# EAGLE board lv1-fc-1 (EAGLE 3.55)
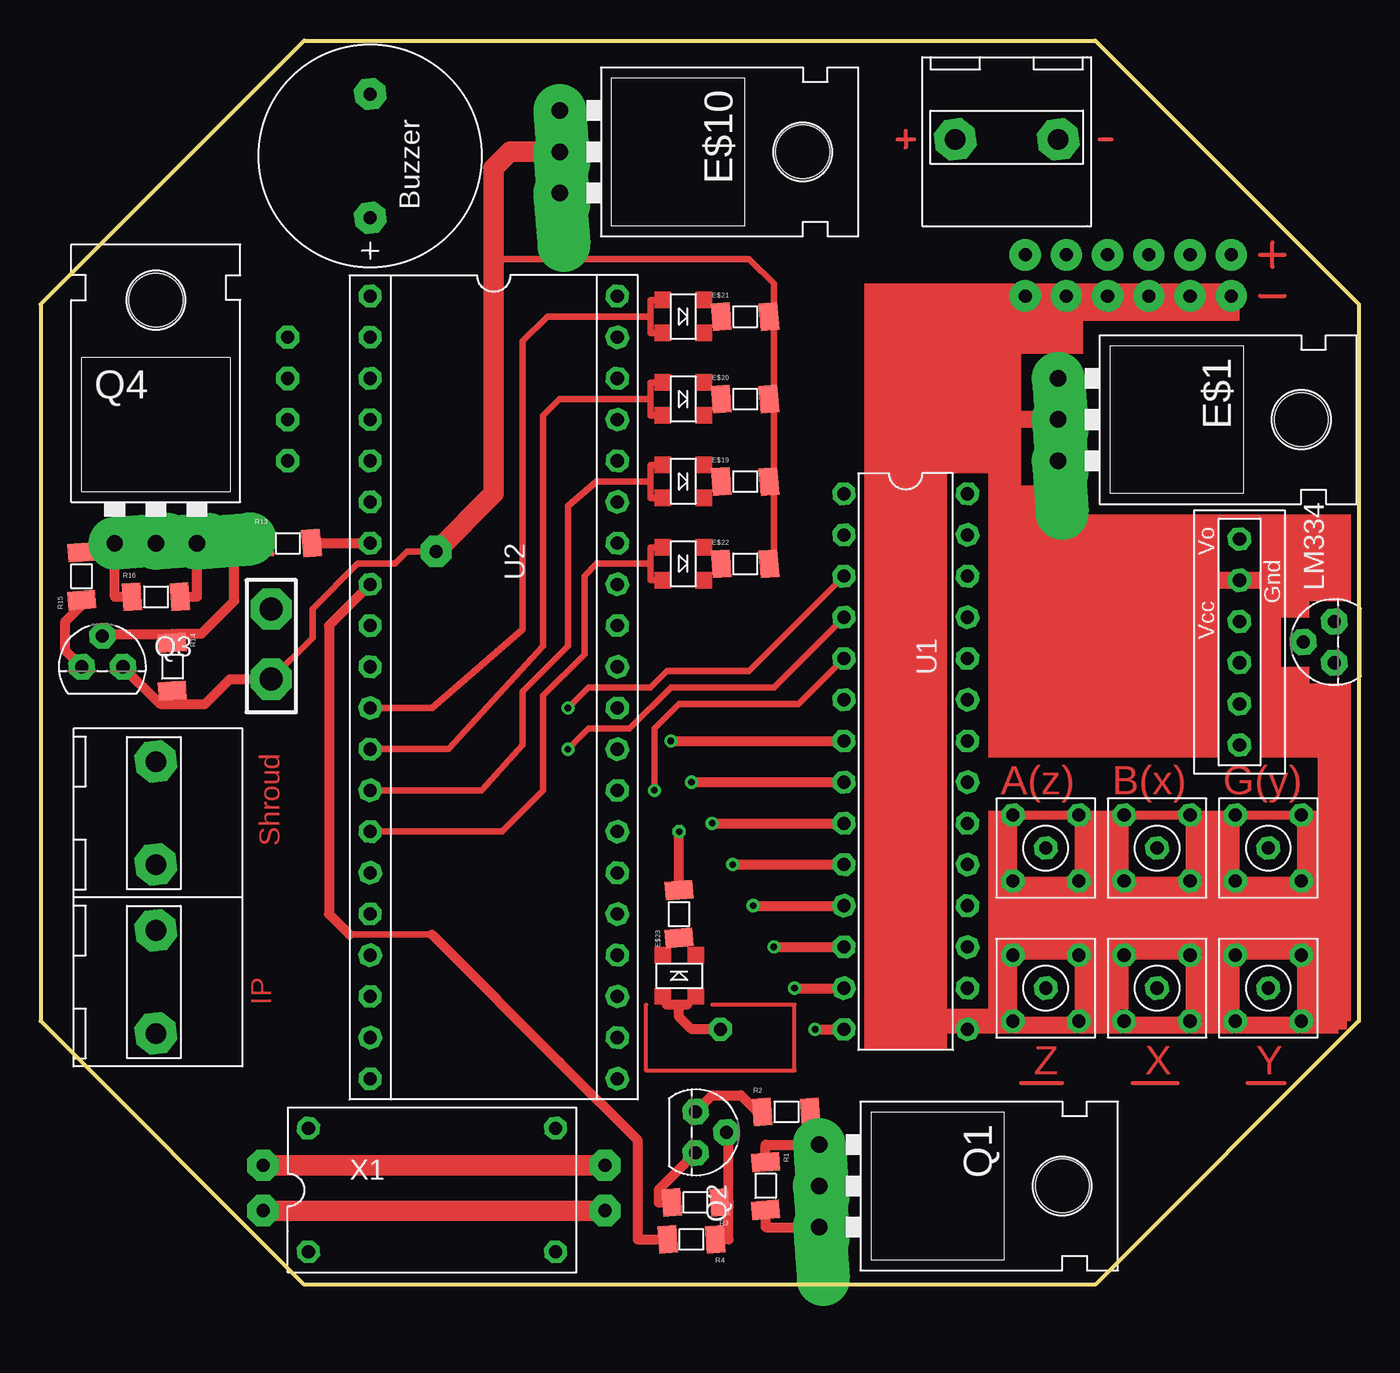
[diagram p0: board, top side]
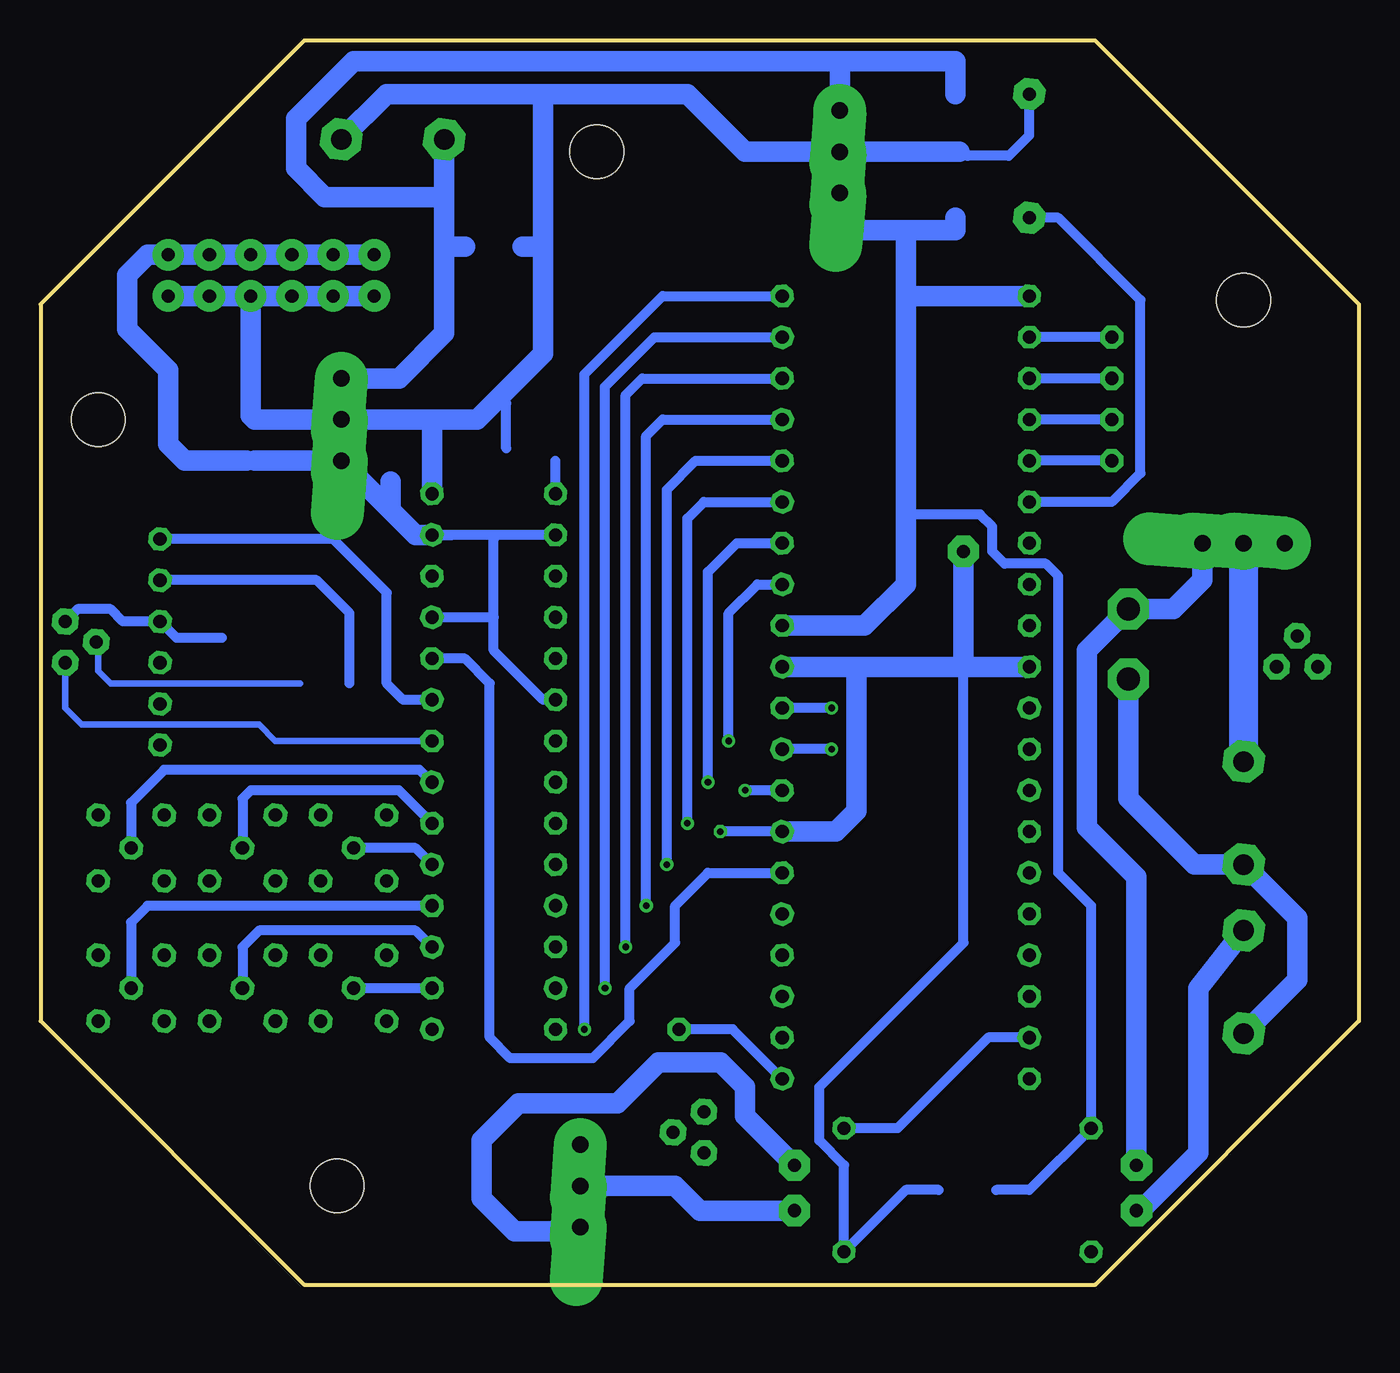
[diagram p1: board, bottom side, seen from below]

Size 81.28 x 76.71 mm. Coordinates in mm from the lower left corner, seen from the top.
Outline: 0,60.45 16.26,76.71 65.02,76.71 81.28,60.45 81.28,16.26 65.02,0 16.26,0 0,16.26 0,60.45
Copper layers used: Top, Bottom

## Footprints (pad centres in the part's own frame; a part is rotated, then mirrored left to right if it is on the bottom)
220L1 = drill 1.016 pad 3.251 offset:  -2.54,-3.81;  0,-3.81;  2.54,-3.81 | hole 3.302: 0,11.176
RO_2 = drill 1.27 pad 2.54 octagon:  0,0;  6.35,0
AX_IN = drill 0.813 pad 1.422 octagon:  0,0;  2.032,2.032;  -2.032,2.032;  -2.032,-2.032;  2.032,-2.032
X5100A = drill 0.813 pad 1.422 octagon:  0,0;  2.54,0;  5.08,0;  7.62,0;  10.16,0;  12.7,0
ZZER = drill 0.813 pad 1.93 octagon:  -3.81,0;  3.81,0
06 = smd 1.143 x 1.702 rotated 4.4:  1.473,0 | smd 1.143 x 1.702 rotated 4.3:  -1.473,0
92 = drill 0.813 pad 1.6 octagon:  1.27,0;  0,1.905;  -1.27,0
L-28S = drill 0.813 pad 1.397 octagon:  -16.51,-3.81;  -13.97,-3.81;  -1.27,-3.81;  1.27,-3.81;  -11.43,-3.81;  -8.89,-3.81;  -3.81,-3.81;  -6.35,-3.81;  3.81,-3.81;  6.35,-3.81;  8.89,-3.81;  11.43,-3.81;  13.97,-3.81;  16.51,-3.81;  16.51,3.81;  13.97,3.81;  11.43,3.81;  8.89,3.81;  6.35,3.81;  3.81,3.81;  1.27,3.81;  -1.27,3.81;  -3.81,3.81;  -6.35,3.81;  -8.89,3.81;  -11.43,3.81;  -13.97,3.81;  -16.51,3.81
P-40 = drill 0.813 pad 1.397 octagon:  -22.86,-7.62;  -20.32,-7.62;  -12.7,-7.62;  -10.16,-7.62;  -17.78,-7.62;  -15.24,-7.62;  -7.62,-7.62;  -5.08,-7.62;  -2.54,-7.62;  0,-7.62;  2.54,-7.62;  5.08,-7.62;  7.62,-7.62;  10.16,-7.62;  12.7,-7.62;  15.24,-7.62;  17.78,-7.62;  20.32,-7.62;  22.86,-7.62;  25.4,-7.62;  25.4,7.62;  22.86,7.62;  20.32,7.62;  17.78,7.62;  15.24,7.62;  12.7,7.62;  10.16,7.62;  7.62,7.62;  5.08,7.62;  2.54,7.62;  0,7.62;  -2.54,7.62;  -5.08,7.62;  -7.62,7.62;  -10.16,7.62;  -12.7,7.62;  -15.24,7.62;  -17.78,7.62;  -20.32,7.62;  -22.86,7.62
PIN = drill 0.813 pad 1.397 octagon:  -7.62,-3.81;  7.62,-3.81;  7.62,3.81;  -7.62,3.81

## Placement (x,y rotation side)
C1  100nF  [06B]  69.6,41.4 90 top
C3  10uF  [A_B_B]  53.34,67.06 180 top
C4  10nF  [06B]  53.34,64.01 180 top
C5  1uf  [06B]  70.87,56.64 0 top
C6  10nF  [06B]  70.87,54.1 0 top
C7  4.7uF  [A_A_B]  59.69,51.05 90 top
C8  100pF  [06B]  51.05,51.56 0 top
C9  1uF  [06B]  24.89,67.56 90 top
C10  100nF  [06B]  27.69,67.56 90 top
C11  100nF  [06B]  24.89,71.88 90 top
C12  10uF  [A_B_B]  27.94,72.9 270 top
C13  100nF  [06B]  24.13,5.84 0 top
E$1  [220L1]  66.55,53.34 270 top
E$2  [RO_2]  56.39,70.61 0 top
E$3  [AX_IN]  61.98,18.29 0 top
E$4  [AX_IN]  75.69,18.29 0 top
E$5  [AX_IN]  61.98,26.92 0 top
E$6  [X5100A]  73.91,45.97 270 top
E$7  [AX_IN]  68.83,26.92 0 top
E$8  [AX_IN]  75.69,26.92 0 top
E$9  [AX_IN]  68.83,18.29 0 top
E$10  [220L1]  35.81,69.85 270 top
E$11  [ZZER]  20.32,69.6 90 top
E$12  [RO_2]  7.11,25.91 90 top
E$13  [D]  39.37,19.05 180 top
E$14  [RO_2]  7.11,15.49 90 top
E$15  [D]  39.62,59.69 90 top
E$16  [D]  39.62,54.61 90 top
E$17  [D]  39.62,49.53 90 top
E$18  [D]  39.62,44.45 90 top
E$19  [06]  43.43,49.53 0 top
E$20  [06]  43.43,54.61 0 top
E$21  [06]  43.43,59.69 0 top
E$22  [06]  43.43,44.45 0 top
E$23  [06]  39.37,22.86 90 top
LM334  [92]  79.76,39.62 90 top
Q1  [220L1]  51.82,6.1 270 top
Q2  [92]  40.39,9.4 270 top
Q3  [92]  3.81,38.1 0 top
Q4  [220L1]  7.11,49.53 0 top
R1  1K  [06]  44.7,6.1 270 top
R2  680  [06]  45.97,10.67 0 top
R3  1K  [06]  40.39,5.08 180 top
R4  680  [06]  40.13,2.79 180 top
R13  680  [06]  15.24,45.72 0 top
R14  1K  [06]  8.13,38.1 270 top
R15  680  [06]  2.54,43.69 90 top
R16  1K  [06]  7.11,42.42 0 top
RL  10K  [06B]  62.23,35.56 90 top
RSET  230  [06B]  64.77,35.56 90 top
U1  MAX197  [L-28S]  53.34,32.26 270 top
U2  17C42A  [P-40]  27.94,38.1 270 top
X1  [PIN]  24.13,5.84 0 top

## Library data of the parts
C1 C3-C13 E$19-E$23 R1-R4 R13-R16 RL RSET = SMD
E$1 E$10 Q1 Q4 = V-REG
E$2-E$9 E$11-E$18 = AESS
LM334 Q2 Q3 = NPN
U1 U2 = IC
X1 = QUARTZ

## Nets
S$1: U1.
S$2: U1. U2.
S$3: U1. U2.
S$4: U1. U2.
S$5: U1. U2.
S$6: U1.
S$7: U1.
S$8: U1.
S$9: U1.
S$11: U2.
S$12: U1. U2.
S$13: E$1. U1.
S$14: U1.
S$15: E$9. U1.
S$16: E$4.
S$17: E$5. U1.
S$18: E$7. U1.
S$19: E$8. U1.
S$21: E$6.
S$22: LM334. U1.
S$23: E$6. LM334.
S$25: E$6. U1.
S$31: E$1.
S$45: E$1. E$2.
S$50: E$10. U2.
S$51: U1. U2.
S$52: U1. U2.
S$54: E$2. E$10.
S$55: U1.
S$56: U1. U2.
S$57: U2.
S$58: U2.
S$59: E$10.
S$63: U2.
S$64: U2.
S$65: U2.
S$66: U2.
S$67: E$11. U2.
S$68: E$11.
S$74: E$12. Q4.
S$79: Q3.
S$81: Q4.
S$83: U2.
S$84: U2.
S$85: E$12. E$14. Q3.
S$87: X1.
S$93: Q2.
S$97: Q2.
S$99: U2. X1.
S$100: U1. U2.
S$101: U2. X1.
S$102: E$14.
S$103: Q1.
S$104: U2.
S$106: U2.
S$107: U2.
S$112: U2.

## Tracks (layer width: path | path; a pad name or v marks a point on that pad's centre or on a via)
S$1  (via drill 0.41 pad 0.81)
  Top 0.61: v38.86,33.53 49.53,33.53
  Bottom 0.61: 35.31,43.18 37.08,43.18 38.86,41.4 v38.86,33.53
S$2  (via drill 0.41 pad 0.81)
  Top 0.61: v40.13,30.99 49.53,30.99
  Bottom 0.61: v40.13,30.99 40.13,43.94 38.35,45.72 35.56,45.72
S$3  (via drill 0.41 pad 0.81)
  Top 0.61: v41.4,28.45 49.53,28.45
  Bottom 0.61: 35.56,48.26 40.39,48.26 41.4,47.24 v41.4,28.45
S$4  (via drill 0.41 pad 0.81)
  Top 0.61: v42.67,25.91 49.53,25.91
  Bottom 0.61: v42.67,25.91 42.67,49.02 40.89,50.8 35.56,50.8
S$5  (via drill 0.41 pad 0.81)
  Top 0.61: v43.94,23.37 49.53,23.37
  Bottom 0.61: 35.56,53.34 42.93,53.34 43.94,52.32 v43.94,23.37
S$6  (via drill 0.41 pad 0.81)
  Top 0.61: v47.75,15.75 49.53,15.75
S$7
  Bottom 0.61: 53.34,41.15 53.34,45.97 | 53.34,41.15 57.15,41.15 | 49.53,36.07 50.29,36.07 53.34,39.12 53.34,41.15
S$8
  Bottom 1.27: U1. 57.15,53.09
S$9
  Bottom 0.61: 49.53,48.77 49.53,50.8
S$10
  Bottom 0.61: 52.58,51.56 52.58,54.36
S$11  (via drill 0.81 pad 1.42)
  Top 0.61: v41.91,15.75 40.13,15.75 39.37,16.51 39.37,17.02
  Bottom 0.61: 35.56,12.7 38.61,15.75 v41.91,15.75
S$12
  Bottom 0.61: 57.15,38.61 55.12,38.61 53.59,37.08 53.59,15.24 52.32,13.97 47.24,13.97 44.96,16.26 44.96,18.29 42.16,21.08 42.16,23.37 40.13,25.4 35.56,25.4
S$13
  Bottom 0.61: 55.88,46.23 57.15,46.23 49.53,46.23
  Bottom 1.27: 68.07,50.8 E$1. 61.47,49.53 | 61.47,49.53 60.71,48.77 | 61.47,49.53 58.17,46.23 57.15,46.23
S$14
  Bottom 0.61: 57.15,18.29 62.23,18.29
S$15
  Bottom 0.61: 57.15,20.83 58.17,21.84 67.82,21.84 68.83,20.83 68.83,18.29
S$16
  Bottom 0.61: 56.9,23.37 74.68,23.37 75.69,22.35 75.69,18.29
S$17
  Bottom 0.61: 61.98,26.92 58.17,26.92 57.15,25.91
S$18
  Bottom 0.61: 68.83,26.92 68.83,29.97 68.33,30.48 59.18,30.48 57.15,28.45
S$19
  Bottom 0.61: 57.15,30.99 57.91,31.75 73.66,31.75 75.69,29.72 75.69,26.92
S$20
  Bottom 0.406: 77.72,39.62 77.72,37.85 76.96,37.08 65.28,37.08
S$21
  Bottom 0.61: 62.23,37.08 62.23,41.4 64.26,43.43 73.91,43.43
S$22
  Bottom 0.406: 57.15,33.53 66.8,33.53 67.82,34.54 78.74,34.54 79.76,35.56 LM334.
S$23
  Bottom 0.61: 79.76,40.89 78.99,41.66 76.96,41.66 76.2,40.89 73.91,40.89 72.9,39.88 70.1,39.88
S$24
  Top 0.254: 60.45,12.45 62.99,12.45
S$25
  Bottom 0.61: 73.91,45.97 63.25,45.97 59.94,42.67 59.94,37.08 58.93,36.07 57.15,36.07
S$26
  Top 0.254: 67.31,12.45 70.1,12.45
S$27
  Top 0.254: 74.42,12.45 76.71,12.45
S$28  (via drill 0.81 pad 1.93)
  other vias: 73.41,63.5
S$29  (via drill 0.81 pad 1.93)
  Bottom 1.27: v60.71,60.96 v73.41,60.96
S$30  (via drill 0.81 pad 1.93)
  other vias: 70.87,60.96
S$31
  Bottom 1.27: 65.53,53.34 62.74,53.34 54.36,53.34 50.29,57.4 50.29,71.63
S$32  (via drill 0.81 pad 1.93)
  other vias: 65.79,60.96
S$33  (via drill 0.81 pad 1.93)
  other vias: 63.25,60.96
S$34
  Top 0.254: 53.34,70.61 53.85,70.61 | 52.83,70.61 53.34,70.61 | 53.34,70.61 53.34,71.12 | 53.34,70.61 53.34,70.1
S$35
  Top 0.254: 65.28,70.61 66.04,70.61
S$36
  Top 0.254: 75.18,63.5 76.71,63.5
S$37
  Top 0.254: 75.95,62.74 75.95,64.26
S$38
  Top 0.254: 75.18,60.96 76.71,60.96
S$39  (via drill 0.81 pad 1.93)
  Bottom 1.27: v60.71,63.5 74.68,63.5 75.95,62.23 75.95,58.93 73.41,56.39 73.41,51.82 72.39,50.8 68.58,50.8
S$40  (via drill 0.81 pad 1.93)
  other vias: 63.25,63.5
S$41  (via drill 0.81 pad 1.93)
  other vias: 65.79,63.5
S$42  (via drill 0.81 pad 1.93)
  other vias: 68.33,63.5
S$43  (via drill 0.81 pad 1.93)
  other vias: 70.87,63.5
S$44
  Bottom 1.27: 59.69,48.01 59.69,49.53
S$45
  Bottom 1.27: 56.39,70.61 56.39,58.67 59.18,55.88 62.74,55.88
S$46
  Bottom 1.27: 50.8,64.01 51.56,64.01
S$47
  Bottom 1.27: 55.12,64.01 55.88,64.01
S$48  (via drill 0.81 pad 1.93)
  Bottom 1.27: 68.33,56.13 v68.33,60.96
S$49
  Bottom 1.27: 68.33,55.88 68.33,53.59 68.07,53.34 65.79,53.34
S$50
  Bottom 1.27: 24.89,65.79 24.89,65.02 29.21,65.02 | 29.21,65.02 27.94,65.02 27.94,60.96 | 27.94,60.96 20.32,60.96 | 27.94,60.2 27.94,60.96 | 27.94,60.2 27.94,59.94 | 27.94,56.64 27.94,56.9 | 27.94,56.64 27.94,60.2 | 35.56,40.64 30.48,40.64 27.94,43.18 27.94,56.64 | 29.21,65.02 31.5,65.02 32,65.53 E$10.
S$51  (via drill 0.41 pad 0.81)
  Top 0.406: 49.53,43.69 43.69,37.85 38.61,37.85 37.59,36.83 33.78,36.83 v32.51,35.56
  Bottom 0.61: v32.51,35.56 35.56,35.56
S$52  (via drill 0.41 pad 0.81)
  Top 0.406: v32.51,33.02 33.78,34.29 36.32,34.29 38.86,36.83 45.21,36.83 49.53,41.15
  Bottom 0.61: v32.51,33.02 35.56,33.02
S$54
  Bottom 1.27: E$2. 59.94,73.41 52.32,73.41 | 52.32,73.41 52.07,73.41 | 50.29,73.41 41.4,73.41 37.85,69.85 32,69.85 24.64,69.85 | 50.29,73.41 52.32,73.41 | 50.29,73.41 50.29,71.88
S$55  (via drill 0.41 pad 0.81)
  Top 0.61: v45.21,20.83 49.53,20.83
  Bottom 0.61: v45.21,20.83 45.21,54.86 44.2,55.88 35.31,55.88
S$56  (via drill 0.41 pad 0.81)
  Top 0.61: v46.48,18.29 49.53,18.29
  Bottom 0.61: v46.48,18.29 46.48,55.37 43.43,58.42 35.56,58.42
S$57
  Bottom 0.61: U2. 42.93,60.96 47.75,56.13 47.75,15.75
S$58  (via drill 0.41 pad 0.81)
  Top 0.61: 39.37,24.89 v39.37,27.94
  Bottom 0.61: 35.56,27.94 v39.37,27.94
  Bottom 1.27: 30.99,37.85 30.99,29.21 32.26,27.94 35.56,27.94
S$59
  Bottom 1.27: 32,72.39 32,75.18
S$60
  Bottom 1.27: 56.64,67.06 63.75,67.06 65.53,68.83 65.53,71.88 61.98,75.44 35.31,75.44 | 35.31,75.44 35.05,75.44 | 35.31,75.44 24.89,75.44 24.89,73.41
S$61
  Top 1.27: 29.21,69.85 31.75,69.85
S$62
  Top 1.27: 28.96,69.85 27.94,68.83
S$63  (via drill 0.81 pad 1.42)
  Bottom 0.61: v15.24,58.42 20.32,58.42
S$64  (via drill 0.81 pad 1.42)
  Bottom 0.61: v15.24,55.88 20.32,55.88
S$65  (via drill 0.81 pad 1.42)
  Bottom 0.61: v15.24,53.34 20.32,53.34
S$66  (via drill 0.81 pad 1.42)
  Bottom 0.61: v15.24,50.8 20.32,50.8
S$67
  Bottom 0.61: 20.32,48.26 15.24,48.26 13.46,50.04 13.46,60.71 18.54,65.79 20.32,65.79
S$68
  Bottom 0.61: 24.13,69.6 21.59,69.6 20.32,70.87 E$11.
S$70
  Top 0.61: 38.61,17.27 39.88,17.27
S$71
  Top 0.254: 37.34,17.27 37.34,13.21 46.48,13.21 46.48,17.27 41.4,17.27
S$74
  Bottom 1.778: E$12. 7.11,45.72
S$75
  Top 0.61: 9.65,44.45 9.65,42.42 9.14,42.42
S$76
  Top 0.61: 4.57,44.45 4.57,42.42 5.33,42.42
S$77
  Top 0.61: 3.81,45.21 2.54,45.21
S$78
  Top 0.61: 8.13,39.88 8.13,40.13 3.81,40.13
S$79
  Top 0.61: Q3. 1.52,39.12 1.52,40.89 2.54,41.91
S$80
  Top 0.61: 8.38,40.13 9.91,40.13 11.94,42.16 11.94,45.21 12.45,45.72 13.46,45.72
S$82
  Top 0.61: 41.91,2.79 42.42,2.79 42.42,4.83
S$83
  Top 0.406: 19.05,21.59 24.13,21.59
  Top 0.61: 20.32,43.18 17.78,40.64 17.78,22.86 19.05,21.59 | 32.26,13.46 36.83,8.89 36.83,2.79 38.35,2.79 | 32.26,13.46 32,13.72 | 24.13,21.59 32.26,13.46
S$84
  Top 0.61: 17.02,45.72 20.32,45.72
S$85  (via drill 0.81 pad 1.93, 1.42 pad 2.54)
  Top 0.406: v24.38,45.21 22.61,45.21 21.84,44.45 19.56,44.45 16.76,41.66 16.76,39.88 v14.22,37.34
  Top 0.61: 8.13,35.81 8.13,36.07 | 8.13,35.81 10.16,35.81 11.68,37.34 v14.22,37.34 | 8.13,35.81 7.37,35.81 5.08,38.1
  Top 1.27: v24.38,45.21 27.94,48.77 27.94,68.58
  Bottom 1.27: 7.11,15.49 3.81,18.8 3.81,22.61 7.11,25.91 10.16,25.91 14.22,29.97 v14.22,37.34 | 24.38,38.35 v24.38,45.21
S$86
  Top 0.406: 37.85,60.71 37.59,60.71 37.59,58.67 37.85,58.67
S$87
  Bottom 0.61: 28.19,47.5 23.37,47.5 22.61,46.74 22.61,45.21 21.84,44.45 19.3,44.45 18.54,43.69 18.54,25.4 16.51,23.37 X1. 20.32,5.84 22.35,5.84
S$89
  Top 0.61: 46.74,3.56 44.7,3.56 44.7,4.06
S$90
  Top 0.61: 46.74,8.64 44.7,8.64 44.7,7.87
S$91
  Top 0.61: 47.5,9.4 47.5,10.67
S$92
  Top 0.61: 42.16,5.08 42.42,5.08 42.42,9.4
S$93
  Top 0.61: Q2. 41.4,11.68 43.18,11.68 44.2,10.67
S$96
  Top 0.406: 45.21,60.45 45.21,61.72 43.69,63.25 28.19,63.25
S$97
  Top 0.61: 38.35,5.08 38.1,5.08 38.1,5.84 40.39,8.13
S$98
  Top 0.406: 37.85,55.63 37.59,55.63 37.59,53.59 37.85,53.59
S$99
  Bottom 0.61: 31.75,9.65 28.45,9.65 22.86,15.24 20.32,15.24
S$100  (via drill 0.41 pad 0.81)
  Top 0.406: v37.85,30.48 37.85,34.29 39.37,35.81 46.74,35.81 49.53,38.61
  Bottom 0.61: 35.56,30.48 v37.85,30.48
S$101
  Bottom 0.61: 24.38,38.1 24.38,21.08 33.27,12.19 33.27,8.89 31.75,7.37 31.75,2.03 27.94,5.84 25.91,5.84
  Bottom 1.27: 20.32,38.1 24.38,38.1 35.56,38.1
S$102  (via drill 0.81 pad 1.93)
  Top 1.27: v13.72,4.57 v34.8,4.57
  Bottom 1.27: 47.75,6.1 42.16,6.1 40.64,4.57 v34.8,4.57 | E$14. 9.91,18.29 9.91,8.13 13.46,4.57
S$103  (via drill 0.81 pad 1.93, 1.42 pad 2.54)
  Top 1.27: v13.72,7.37 v34.8,7.37
  Bottom 1.27: 9.65,46.23 9.65,43.43 11.43,41.66 v14.22,41.66 16.76,39.12 16.76,28.19 13.72,25.15 13.72,7.11 | v34.8,7.37 37.85,10.41 37.85,12.19 39.37,13.72 43.18,13.72 45.72,11.18 47.75,11.18 | 47.75,11.18 51.82,11.18 54.1,8.89 54.1,5.33 52.07,3.3 48.26,3.3 Q1. | 47.75,11.18 47.24,11.18
S$104
  Top 0.406: 37.59,54.61 32,54.61 30.99,53.59 30.99,39.37 25.15,33.02 20.32,33.02
S$105
  Top 0.406: 38.1,50.55 37.59,50.55 37.59,48.51 37.85,48.51
S$106
  Top 0.406: 37.59,49.53 34.29,49.53 32.51,48.01 32.51,39.37 29.72,36.58 29.72,33.27 27.18,30.48 20.32,30.48
S$107
  Top 0.406: 37.85,43.43 37.59,43.43 37.59,44.45 | 38.1,45.47 37.59,45.47 37.59,44.45 | 37.59,44.45 34.29,44.45 33.53,43.69 33.53,38.86 30.99,36.32 30.99,30.48 28.45,27.94 20.32,27.94
S$109
  Top 0.406: 45.21,59.18 45.21,44.45
S$112
  Top 0.406: 20.32,35.56 24.13,35.56 29.72,40.39 29.72,43.94 | 37.59,59.69 31.24,59.69 29.72,58.17 29.72,43.94 | 29.72,43.69 29.72,43.94
(copper drawn outside any net)
  shapes: Top area x58

## Text on the board
Top: Shroud | A(z) | B(x) | G(y) | IP | Z | X | Y